# Allegro board A83T_REF4_LPDDR2_32X1_V1_0_20140821.brd
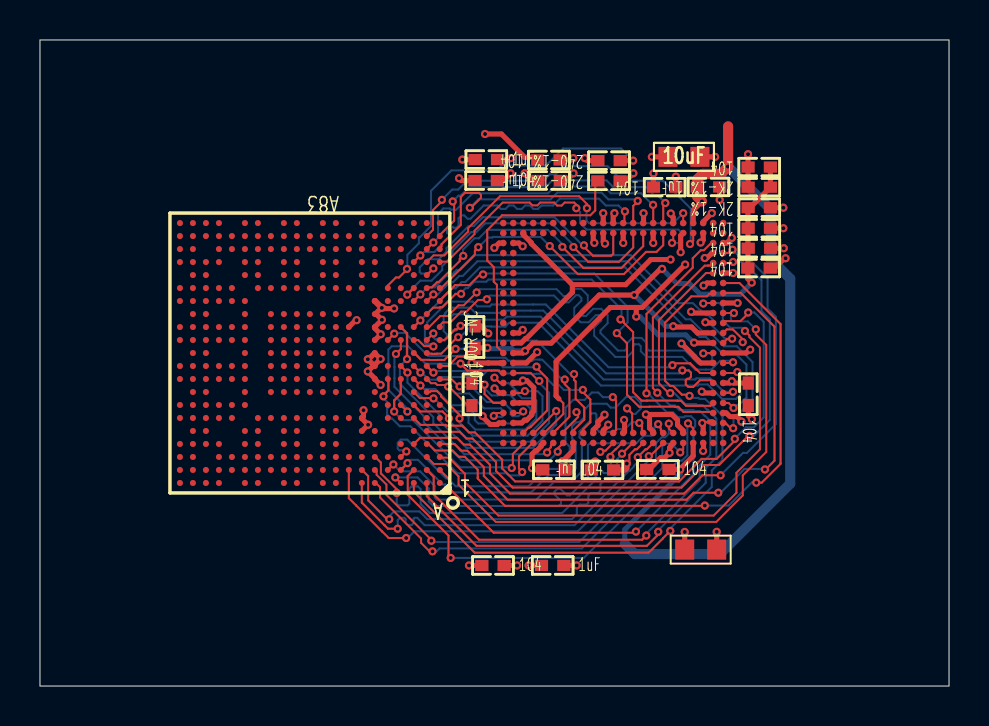
[diagram p0: board, top side]
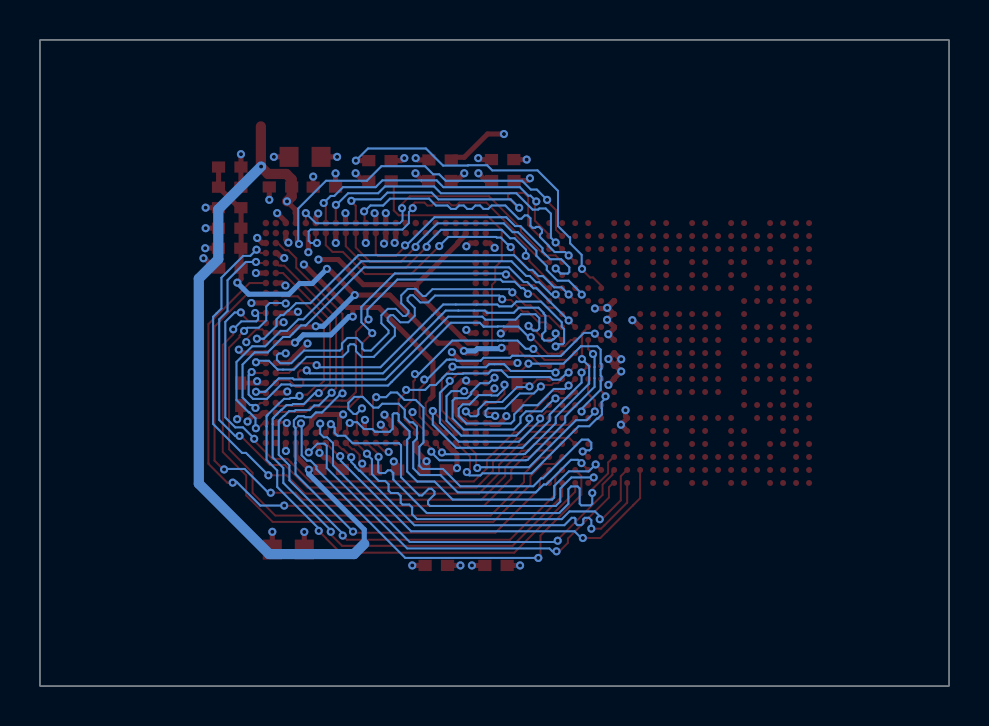
[diagram p1: board, bottom side, seen from below]

Outline 45.48 x 32.32 mm; copper layers: TOP, GND1, POWER1, BOTTOM. Coordinates in mm from the lower left corner of the outline.
Outline path: 0,32.32 0,0 45.48,0 45.48,32.32 0,32.32

## Design rules (mm)
net group SCK: nets SCK SCKB
net group ADD: nets SA0 SA1 SA2 SA3 SA4 SA5 SA6 SA7 SA8 SA9 SCKE0 SCKE1 SCS0 SCS1
net group DQS-CK: nets SDQS0 SDQS0B SDQS1 SDQS1B SDQS2 SDQS2B SDQS3 SDQS3B
net group SDQ0-7: nets SDQ0 SDQ1 SDQ2 SDQ3 SDQ4 SDQ5 SDQ6 SDQ7 SDQM0
net group SDQ8-15: nets SDQ8 SDQ9 SDQ10 SDQ11 SDQ12 SDQ13 SDQ14 SDQ15 SDQM1
net group SDQ16-23: nets SDQ16 SDQ17 SDQ18 SDQ19 SDQ20 SDQ21 SDQ22 SDQ23 SDQM2
net group SQD24-31: nets SDQ24 SDQ25 SDQ26 SDQ27 SDQ28 SDQ29 SDQ30 SDQ31 SDQM3

## Placement (name value [footprint] x y rotation side)
DC1  104  [C0402]  25.46 26.32 180 top
DC2  10uF  [C0603]  33.05 6.82 0 top
DC3  1uF  [C0402]  25.65 6.03 0 top
DC4  1uF  [C0402]  22.33 26.33 0 top
DC5  104  [C0402]  22.32 25.29 0 top
DC6  104  [C0402]  22.66 6.03 0 top
DC7  104  [C0402]  21.77 17.46 270 top
DC8  1uF  [C0402]  28.14 10.81 180 top
DC9  1uF  [C0402]  25.47 25.29 180 top
DC10  10uF  [C0603]  32.22 26.47 0 top
DC11  104  [C0402]  25.71 10.82 0 top
DC12  104  [C0402]  35.44 14.59 270 top
DC13  104  [C0402]  31.25 24.96 180 top
DC14  1uF  [C0402]  33.44 24.97 180 top
DC15  104  [C0402]  30.91 10.83 0 top
DC16  104  [C0402]  35.98 25.96 180 top
DC17  104  [C0402]  35.99 22.9 180 top
DC18  104  [C0402]  35.99 21.9 180 top
DC19  104  [C0402]  35.98 20.91 180 top
DR1  2K-1%  [R0402]  35.99 24.95 180 top
DR2  2K-1%  [R0402]  35.99 23.93 180 top
DR3  100R-NC  [R0402]  21.61 14.59 90 top
DR5  240-1%  [R0402]  28.47 26.28 180 top
DR8  240-1%  [R0402]  28.47 25.27 180 top
DU2  LPDDR2_PoP168BALL  [BGA168P0_50B12X12H0_72]  28.68 17.66 0 top
NOREF  -  []  6.47 23.96 0 top
NOREF#2  -  []  27.12 5.56 90 top
U1  A83T  [BGA345P0_65B14X14]  13.5 16.66 180 top

## Library data of the parts
DC1-DC19 = CAPACITOR_0
DR1-DR3 = ?_0
DR5 DR8 = R
DU2 = LPDDR2_PoP168BALL_1
U1 = A83T

## Footprints (pads in the part's own frame, mm; a bottom-side part is the same pattern mirrored in y, then rotated)
BGA168P0_50B12X12H0_72
  round 0.33 smd: A1(-5.5,5.5) A2(-5,5.5) A3(-4.5,5.5) A4(-4,5.5) A5(-3.5,5.5) A6(-3,5.5) A7(-2.5,5.5) A8(-2,5.5) A9(-1.5,5.5) A10(-1,5.5) A11(-0.5,5.5) A12(0,5.5) A13(0.5,5.5) A14(1,5.5) A15(1.5,5.5) A16(2,5.5) A17(2.5,5.5) A18(3,5.5) A19(3.5,5.5) A20(4,5.5) A21(4.5,5.5) A22(5,5.5) A23(5.5,5.5) AA1(-5.5,-4.5) AA2(-5,-4.5) AA22(5,-4.5) AA23(5.5,-4.5) AB1(-5.5,-5) AB2(-5,-5) AB3(-4.5,-5) AB4(-4,-5) AB5(-3.5,-5) AB6(-3,-5) AB7(-2.5,-5) AB8(-2,-5) AB9(-1.5,-5) AB10(-1,-5) AB11(-0.5,-5) AB12(0,-5) AB13(0.5,-5) AB14(1,-5) AB15(1.5,-5) AB16(2,-5) AB17(2.5,-5) AB18(3,-5) AB19(3.5,-5) AB20(4,-5) AB21(4.5,-5) AB22(5,-5) AB23(5.5,-5) AC1(-5.5,-5.5) AC2(-5,-5.5) AC3(-4.5,-5.5) AC4(-4,-5.5) AC5(-3.5,-5.5) AC6(-3,-5.5) AC7(-2.5,-5.5) AC8(-2,-5.5) AC9(-1.5,-5.5) AC10(-1,-5.5) AC11(-0.5,-5.5) AC12(0,-5.5) AC13(0.5,-5.5) AC14(1,-5.5) AC15(1.5,-5.5) AC16(2,-5.5) AC17(2.5,-5.5) AC18(3,-5.5) AC19(3.5,-5.5) AC20(4,-5.5) AC21(4.5,-5.5) AC22(5,-5.5) AC23(5.5,-5.5) B1(-5.5,5) B2(-5,5) B3(-4.5,5) B4(-4,5) B5(-3.5,5) B6(-3,5) B7(-2.5,5) B8(-2,5) B9(-1.5,5) B10(-1,5) B11(-0.5,5) B12(0,5) B13(0.5,5) B14(1,5) B15(1.5,5) B16(2,5) B17(2.5,5) B18(3,5) B19(3.5,5) B20(4,5) B21(4.5,5) B22(5,5) B23(5.5,5) C1(-5.5,4.5) C2(-5,4.5) C22(5,4.5) C23(5.5,4.5) D1(-5.5,4) D2(-5,4) D22(5,4) D23(5.5,4) E1(-5.5,3.5) E2(-5,3.5) E22(5,3.5) E23(5.5,3.5) F1(-5.5,3) F2(-5,3) F22(5,3) F23(5.5,3) G1(-5.5,2.5) G2(-5,2.5) G22(5,2.5) G23(5.5,2.5) H1(-5.5,2) H2(-5,2) H22(5,2) H23(5.5,2) J1(-5.5,1.5) J2(-5,1.5) J22(5,1.5) J23(5.5,1.5) K1(-5.5,1) K2(-5,1) K22(5,1) K23(5.5,1) L1(-5.5,0.5) L2(-5,0.5) L22(5,0.5) L23(5.5,0.5) M1(-5.5,0) M2(-5,0) M22(5,0) M23(5.5,0) N1(-5.5,-0.5) N2(-5,-0.5) N22(5,-0.5) N23(5.5,-0.5) P1(-5.5,-1) P2(-5,-1) P22(5,-1) P23(5.5,-1) R1(-5.5,-1.5) R2(-5,-1.5) R22(5,-1.5) R23(5.5,-1.5) T1(-5.5,-2) T2(-5,-2) T22(5,-2) T23(5.5,-2) U1(-5.5,-2.5) U2(-5,-2.5) U22(5,-2.5) U23(5.5,-2.5) V1(-5.5,-3) V2(-5,-3) V22(5,-3) V23(5.5,-3) W1(-5.5,-3.5) W2(-5,-3.5) W22(5,-3.5) W23(5.5,-3.5) Y1(-5.5,-4) Y2(-5,-4) Y22(5,-4) Y23(5.5,-4)
BGA345P0_65B14X14
  round 0.3 smd: A1(-6.5,6.5) A2(-5.85,6.5) A3(-5.2,6.5) A4(-4.55,6.5) A6(-3.25,6.5) A7(-2.6,6.5) A9(-1.3,6.5) A10(-0.65,6.5) A12(0.65,6.5) A13(1.3,6.5) A15(2.6,6.5) A16(3.25,6.5) A18(4.55,6.5) A19(5.2,6.5) A20(5.85,6.5) A21(6.5,6.5) AA1(-6.5,-6.5) AA2(-5.85,-6.5) AA3(-5.2,-6.5) AA4(-4.55,-6.5) AA6(-3.25,-6.5) AA7(-2.6,-6.5) AA9(-1.3,-6.5) AA10(-0.65,-6.5) AA12(0.65,-6.5) AA13(1.3,-6.5) AA15(2.6,-6.5) AA16(3.25,-6.5) AA18(4.55,-6.5) AA19(5.2,-6.5) AA20(5.85,-6.5) AA21(6.5,-6.5) B1(-6.5,5.85) B2(-5.85,5.85) B3(-5.2,5.85) B4(-4.55,5.85) B5(-3.9,5.85) B6(-3.25,5.85) B7(-2.6,5.85) B8(-1.95,5.85) B9(-1.3,5.85) B10(-0.65,5.85) B11(0,5.85) B12(0.65,5.85) B13(1.3,5.85) B14(1.95,5.85) B15(2.6,5.85) B16(3.25,5.85) B17(3.9,5.85) B18(4.55,5.85) B19(5.2,5.85) B20(5.85,5.85) B21(6.5,5.85) C1(-6.5,5.2) C2(-5.85,5.2) C4(-4.55,5.2) C5(-3.9,5.2) C6(-3.25,5.2) C7(-2.6,5.2) C8(-1.95,5.2) C9(-1.3,5.2) C10(-0.65,5.2) C11(0,5.2) C12(0.65,5.2) C13(1.3,5.2) C14(1.95,5.2) C15(2.6,5.2) C16(3.25,5.2) C17(3.9,5.2) C18(4.55,5.2) C20(5.85,5.2) C21(6.5,5.2) D1(-6.5,4.55) D2(-5.85,4.55) D3(-5.2,4.55) D4(-4.55,4.55) D6(-3.25,4.55) D7(-2.6,4.55) D9(-1.3,4.55) D10(-0.65,4.55) D12(0.65,4.55) D13(1.3,4.55) D15(2.6,4.55) D16(3.25,4.55) D18(4.55,4.55) D19(5.2,4.55) D20(5.85,4.55) D21(6.5,4.55) E2(-5.85,3.9) E3(-5.2,3.9) E6(-3.25,3.9) E7(-2.6,3.9) E9(-1.3,3.9) E10(-0.65,3.9) E12(0.65,3.9) E13(1.3,3.9) E15(2.6,3.9) E16(3.25,3.9) E19(5.2,3.9) E20(5.85,3.9) F1(-6.5,3.25) F2(-5.85,3.25) F3(-5.2,3.25) F4(-4.55,3.25) F5(-3.9,3.25) F7(-2.6,3.25) F8(-1.95,3.25) F9(-1.3,3.25) F10(-0.65,3.25) F11(0,3.25) F12(0.65,3.25) F13(1.3,3.25) F14(1.95,3.25) F15(2.6,3.25) F17(3.9,3.25) F18(4.55,3.25) F19(5.2,3.25) F20(5.85,3.25) F21(6.5,3.25) G1(-6.5,2.6) G2(-5.85,2.6) G3(-5.2,2.6) G4(-4.55,2.6) G5(-3.9,2.6) G6(-3.25,2.6) G16(3.25,2.6) G17(3.9,2.6) G18(4.55,2.6) G19(5.2,2.6) G20(5.85,2.6) G21(6.5,2.6) H2(-5.85,1.95) H3(-5.2,1.95) H6(-3.25,1.95) H8(-1.95,1.95) H9(-1.3,1.95) H10(-0.65,1.95) H11(0,1.95) H12(0.65,1.95) H13(1.3,1.95) H14(1.95,1.95) H16(3.25,1.95) H19(5.2,1.95) H20(5.85,1.95) J1(-6.5,1.3) J2(-5.85,1.3) J3(-5.2,1.3) J4(-4.55,1.3) J5(-3.9,1.3) J6(-3.25,1.3) J8(-1.95,1.3) J9(-1.3,1.3) J10(-0.65,1.3) J11(0,1.3) J12(0.65,1.3) J13(1.3,1.3) J14(1.95,1.3) J16(3.25,1.3) J17(3.9,1.3) J18(4.55,1.3) J19(5.2,1.3) J20(5.85,1.3) J21(6.5,1.3) K1(-6.5,0.65) K2(-5.85,0.65) K3(-5.2,0.65) K4(-4.55,0.65) K5(-3.9,0.65) K6(-3.25,0.65) K8(-1.95,0.65) K9(-1.3,0.65) K10(-0.65,0.65) K11(0,0.65) K12(0.65,0.65) K13(1.3,0.65) K14(1.95,0.65) K16(3.25,0.65) K17(3.9,0.65) K18(4.55,0.65) K19(5.2,0.65) K20(5.85,0.65) K21(6.5,0.65) L2(-5.85,0) L3(-5.2,0) L6(-3.25,0) L8(-1.95,0) L9(-1.3,0) L10(-0.65,0) L11(0,0) L12(0.65,0) L13(1.3,0) L14(1.95,0) L16(3.25,0) L19(5.2,0) L20(5.85,0) M1(-6.5,-0.65) M2(-5.85,-0.65) M3(-5.2,-0.65) M4(-4.55,-0.65) M5(-3.9,-0.65) M6(-3.25,-0.65) M8(-1.95,-0.65) M9(-1.3,-0.65) M10(-0.65,-0.65) M11(0,-0.65) M12(0.65,-0.65) M13(1.3,-0.65) M14(1.95,-0.65) M16(3.25,-0.65) M17(3.9,-0.65) M18(4.55,-0.65) M19(5.2,-0.65) M20(5.85,-0.65) M21(6.5,-0.65) N1(-6.5,-1.3) N2(-5.85,-1.3) N3(-5.2,-1.3) N4(-4.55,-1.3) N5(-3.9,-1.3) N6(-3.25,-1.3) N8(-1.95,-1.3) N9(-1.3,-1.3) N10(-0.65,-1.3) N11(0,-1.3) N12(0.65,-1.3) N13(1.3,-1.3) N14(1.95,-1.3) N16(3.25,-1.3) N17(3.9,-1.3) N18(4.55,-1.3) N19(5.2,-1.3) N20(5.85,-1.3) N21(6.5,-1.3) P2(-5.85,-1.95) P3(-5.2,-1.95) P6(-3.25,-1.95) P8(-1.95,-1.95) P9(-1.3,-1.95) P10(-0.65,-1.95) P11(0,-1.95) P12(0.65,-1.95) P13(1.3,-1.95) P14(1.95,-1.95) P16(3.25,-1.95) P19(5.2,-1.95) P20(5.85,-1.95) R1(-6.5,-2.6) R2(-5.85,-2.6) R3(-5.2,-2.6) R4(-4.55,-2.6) R5(-3.9,-2.6) R6(-3.25,-2.6) R16(3.25,-2.6) R17(3.9,-2.6) R18(4.55,-2.6) R19(5.2,-2.6) R20(5.85,-2.6) R21(6.5,-2.6) T1(-6.5,-3.25) T2(-5.85,-3.25) T3(-5.2,-3.25) T4(-4.55,-3.25) T5(-3.9,-3.25) T7(-2.6,-3.25) T8(-1.95,-3.25) T9(-1.3,-3.25) T10(-0.65,-3.25) T11(0,-3.25) T12(0.65,-3.25) T13(1.3,-3.25) T14(1.95,-3.25) T15(2.6,-3.25) T17(3.9,-3.25) T18(4.55,-3.25) T19(5.2,-3.25) T20(5.85,-3.25) T21(6.5,-3.25) U2(-5.85,-3.9) U3(-5.2,-3.9) U6(-3.25,-3.9) U7(-2.6,-3.9) U9(-1.3,-3.9) U10(-0.65,-3.9) U12(0.65,-3.9) U13(1.3,-3.9) U15(2.6,-3.9) U16(3.25,-3.9) U19(5.2,-3.9) U20(5.85,-3.9) V1(-6.5,-4.55) V2(-5.85,-4.55) V3(-5.2,-4.55) V4(-4.55,-4.55) V6(-3.25,-4.55) V7(-2.6,-4.55) V9(-1.3,-4.55) V10(-0.65,-4.55) V12(0.65,-4.55) V13(1.3,-4.55) V15(2.6,-4.55) V16(3.25,-4.55) V18(4.55,-4.55) V19(5.2,-4.55) V20(5.85,-4.55) V21(6.5,-4.55) W1(-6.5,-5.2) W2(-5.85,-5.2) W4(-4.55,-5.2) W5(-3.9,-5.2) W6(-3.25,-5.2) W7(-2.6,-5.2) W8(-1.95,-5.2) W9(-1.3,-5.2) W10(-0.65,-5.2) W11(0,-5.2) W12(0.65,-5.2) W13(1.3,-5.2) W14(1.95,-5.2) W15(2.6,-5.2) W16(3.25,-5.2) W17(3.9,-5.2) W18(4.55,-5.2) W20(5.85,-5.2) W21(6.5,-5.2) Y1(-6.5,-5.85) Y2(-5.85,-5.85) Y3(-5.2,-5.85) Y4(-4.55,-5.85) Y5(-3.9,-5.85) Y6(-3.25,-5.85) Y7(-2.6,-5.85) Y8(-1.95,-5.85) Y9(-1.3,-5.85) Y10(-0.65,-5.85) Y11(0,-5.85) Y12(0.65,-5.85) Y13(1.3,-5.85) Y14(1.95,-5.85) Y15(2.6,-5.85) Y16(3.25,-5.85) Y17(3.9,-5.85) Y18(4.55,-5.85) Y19(5.2,-5.85) Y20(5.85,-5.85) Y21(6.5,-5.85)
C0402
  rect 0.66x0.56 smd: 1(-0.56,0) 2(0.56,0)
C0603
  rect 0.95x1 smd: 1(-0.8,0) 2(0.8,0)
R0402
  rect 0.66x0.56 smd: 1(-0.56,0) 2(0.56,0)

## Nets
GND: DC1.1 DC2.1 DC3.1 DC4.1 DC5.1 DC6.1 DC7.1 DC8.1 DC9.1 DC10.1 DC11.1 DC12.1 DC13.1 DC14.1 DC15.1 DC17.1 DC18.1 DC19.1 DR2.1 DR5.2 DR8.1 DU2.A12(VSSQ_0) DU2.A15(VSSQ_1) DU2.A18(VSSQ_2) DU2.A21(VSS_0) DU2.AA1(VSS_5) DU2.AB7(VSSCA_1) DU2.AB11(VSS_7) DU2.AC5(VSS_6) DU2.AC12(VSSQ_3) DU2.AC15(VSSQ_4) DU2.AC18(VSSQ_5) DU2.AC21(VSS_8) DU2.B10(VSS_1) DU2.C1(VSS_2) DU2.C23(VSSQ_6) DU2.F23(VSSQ_7) DU2.J23(VSSQ_8) DU2.M2(VSS_3) DU2.M23(VSS_9) DU2.P23(VSSQ_9) DU2.R1(VSS_4) DU2.U23(VSSQ_10) DU2.V1(VSSCA_0) DU2.Y23(VSSQ_11) U1.A1(GND0) U1.A21(GND1) U1.AA1(GND35) U1.AA21(GND36) U1.C7(GND2) U1.C11(GND37) U1.F5(GND6) U1.G6(GND3) U1.G16(GND4) U1.G17(GND5) U1.H6(GND33) U1.H8(GND7) U1.H12(GND8) U1.H14(GND9) U1.H16(GND10) U1.J8(GND11) U1.J13(GND12) U1.J17(GND13) U1.K5(GND14) U1.K8(GND15) U1.K9(GND16) U1.K10(GND17) U1.K11(GND18) U1.K12(GND19) U1.L8(GND21) U1.L16(GND22) U1.M8(GND20) U1.N5(GND23) U1.N9(GND24) U1.N10(GND25) U1.N11(GND26) U1.N12(GND27) U1.N14(GND29) U1.N17(GND30) U1.P8(GND31) U1.P12(GND28) U1.P16(GND32) U1.T18(GND34) U1.U6(GND38)
VCC-DRAM: DC2.2 DC3.2 DC4.2 DC5.2 DC6.2 DC8.2 DC9.2 DC10.2 DC11.2 DC12.2 DC13.2 DC16.2 DR1.2 DU2.AA2(VDD2_4) DU2.AA22(VDDQ_11) DU2.AB10(VDD2_6) DU2.AB13(VDDQ_3) DU2.AB16(VDDQ_4) DU2.AB19(VDDQ_5) DU2.AB21(VDD2_7) DU2.AC8(VDDCA_2) DU2.B11(VDD2_0) DU2.B13(VDDQ_0) DU2.B16(VDDQ_1) DU2.B19(VDDQ_2) DU2.B21(VDD2_1) DU2.C2(VDD2_2) DU2.D22(VDDQ_6) DU2.G22(VDDQ_7) DU2.K22(VDDQ_8) DU2.L22(VDD2_5) DU2.R2(VDD2_3) DU2.R22(VDDQ_9) DU2.U2(VDDCA_0) DU2.V22(VDDQ_10) DU2.W2(VDDCA_1) U1.E7(VCC-DRAM1) U1.F7(VCC-DRAM3) U1.J6(VCC-DRAM4) U1.K6(VCC-DRAM5) U1.L6(VCC-DRAM7) U1.M6(VCC-DRAM6) U1.N6(VCC-DRAM8) U1.P6(VCC-DRAM0) U1.R6(VCC-DRAM2)
VDD18-LPDDR: DC14.2 DC15.2 DU2.A11(VDD1_0) DU2.A20(VDD1_1) DU2.AB5(VDD1_4) DU2.AC20(VDD1_5) DU2.B3(VDD1_2) DU2.N2(VDD1_3) DU2.N22(VDD1_6)
VDD-DRAMPLL: DC1.2 U1.N8(VDD-SPLL)
SA0: DU2.AC6(CA0) U1.N4(SA0)
SA1: DU2.AB6(CA1) U1.M5(SA1)
SA2: DU2.AC7(CA2) U1.M4(SA2)
SA3: DU2.AB8(CA3) U1.L3(SA3)
SA4: DU2.AB9(CA4) U1.K3(SA4)
SA5: DU2.W1(CA5) U1.J3(SA5)
SA6: DU2.V2(CA6) U1.H2(SA6)
SA7: DU2.U1(CA7) U1.H3(SA7)
SA8: DU2.T2(CA8) U1.G3(SA8)
SA9: DU2.T1(CA9) U1.G4(SA9)
SCK: DR3.2 DU2.Y2(CK_T) U1.J1(SCK)
SCKB: DR3.1 DU2.Y1(CK_C) U1.J2(SCKB)
SCKE0: DU2.AC3(CKE0) U1.J4(SCKE0)
SCKE1: DU2.AC4(CKE1) U1.J5(SCKE1)
SCS0: DU2.AB3(CS0_N) U1.K2(SCS0)
SCS1: DU2.AB4(CS1_N) U1.K4(SCS1)
SDQ0: DU2.AA23(DQ0) U1.R2(SDQ0)
SDQ1: DU2.Y22(DQ1) U1.R1(SDQ1)
SDQ2: DU2.W22(DQ2) U1.P2(SDQ2)
SDQ3: DU2.W23(DQ3) U1.N3(SDQ3)
SDQ4: DU2.V23(DQ4) U1.M1(SDQ4)
SDQ5: DU2.U22(DQ5) U1.M2(SDQ5)
SDQ6: DU2.T22(DQ6) U1.M3(SDQ6)
SDQ7: DU2.T23(DQ7) U1.L2(SDQ7)
SDQ8: DU2.A17(DQ25) U1.Y1(SDQ8)
SDQ9: DU2.A16(DQ26) U1.W2(SDQ9)
SDQ10: DU2.A14(DQ29) U1.W1(SDQ10)
SDQ11: DU2.A13(DQ30) U1.V3(SDQ11)
SDQ12: DU2.B12(DQ31) U1.U2(SDQ12)
SDQ13: DU2.B14(DQ28) U1.T3(SDQ13)
SDQ14: DU2.B15(DQ27) U1.T2(SDQ14)
SDQ15: DU2.B17(DQ24) U1.T1(SDQ15)
SDQ16: DU2.E23(DQ13) U1.E2(SDQ16)
SDQ17: DU2.G23(DQ10) U1.D2(SDQ17)
SDQ18: DU2.H23(DQ9) U1.D1(SDQ18)
SDQ19: DU2.D23(DQ14) U1.D3(SDQ19)
SDQ20: DU2.F22(DQ11) U1.A2(SDQ20)
SDQ21: DU2.E22(DQ12) U1.B2(SDQ21)
SDQ22: DU2.C22(DQ15) U1.B1(SDQ22)
SDQ23: DU2.H22(DQ8) U1.A3(SDQ23)
SDQ24: DU2.AB17(DQ22) U1.A4(SDQ24)
SDQ25: DU2.AB14(DQ18) U1.B4(SDQ25)
SDQ26: DU2.AB12(DQ16) U1.C4(SDQ26)
SDQ27: DU2.AB15(DQ20) U1.B5(SDQ27)
SDQ28: DU2.AC13(DQ17) U1.C6(SDQ28)
SDQ29: DU2.AC16(DQ21) U1.A7(SDQ29)
SDQ30: DU2.AC17(DQ23) U1.B8(SDQ30)
SDQ31: DU2.AC14(DQ19) U1.B7(SDQ31)
SDQM0: DU2.N23(DM0) U1.R3(SDQM0)
SDQM1: DU2.B20(DM3) U1.Y2(SDQM1)
SDQM2: DU2.L23(DM1) U1.F3(SDQM2)
SDQM3: DU2.AB20(DM2) U1.B3(SDQM3)
SDQS0: DU2.R23(DQS0_T) U1.N1(SDQS0)
SDQS0B: DU2.P22(DQS0_C) U1.N2(SDQS0B)
SDQS1: DU2.B18(DQS3_T) U1.V1(SDQS1)
SDQS1B: DU2.A19(DQS3_C) U1.V2(SDQS1B)
SDQS2: DU2.J22(DQS1_T) U1.C1(SDQS2)
SDQS2B: DU2.K23(DQS1_C) U1.C2(SDQS2B)
SDQS3: DU2.AB18(DQS2_T) U1.B6(SDQS3)
SDQS3B: DU2.AC19(DQS2_C) U1.A6(SDQS3B)
SVREF: DC7.2 DC16.1 DC17.2 DC18.2 DC19.2 DR1.1 DR2.2 DU2.M22(VREFDQ) DU2.P2(VREFCA) U1.K1(SVREF)
N21024816: DR5.1 U1.T5(SZQ)
N21100572: DR8.2 DU2.P1(ZQ)

Pads without a net: DU2 A1 A2 A3 A4 A5 A6 A7 A8 A9 A10 A22 A23 AB1 AB2 AB22 AB23 AC1 AC2 AC9 AC10 AC11 AC22 AC23 B1 B2 B4 B5 B6 B7 B8 B9 B22 B23 D1 D2 E1 E2 F1 F2 G1 G2 H1 H2 J1 J2 K1 K2 L1 L2 M1 N1; U1 A9 A10 A12 A13 A15 A16 A18 A19 A20 AA2 AA3 AA4 AA6 AA7 AA9 AA10 AA12 AA13 AA15 AA16 AA18 AA19 AA20 B9 B10 B11 B12 B13 B14 B15 B16 B17 B18 B19 B20 B21 C5 C8 C9 C10 C12 C13 C14 C15 C16 C17 C18 C20 C21 D4 D6 D7 D9 D10 D12 D13 D15 D16 D18 D19 D20 D21 E3 E6 E9 E10 E12 E13 E15 E16 E19 E20 F1 F2 F4 F8 F9 F10 F11 F12 F13 F14 F15 F17 F18 F19 F20 F21 G1 G2 G5 G18 G19 G20 G21 H9 H10 H11 H13 H19 H20 J9 J10 J11 J12 J14 J16 J18 J19 J20 J21 K13 K14 K16 K17 K18 K19 K20 K21 L9 L10 L11 L12 L13 L14 L19 L20 M9 M10 M11 M12 M13 M14 M16 M17 M18 M19 M20 M21 N13 N16 N18 N19 N20 N21 P3 P9 P10 P11 P13 P14 P19 P20 R4 R5 R16 R17 R18 R19 R20 R21 T4 T7 T8 T9 T10 T11 T12 T13 T14 T15 T17 T19 T20 T21 U3 U7 U9 U10 U12 U13 U15 U16 U19 U20 V4 V6 V7 V9 V10 V12 V13 V15 V16 V18 V19 V20 V21 W4 W5 W6 W7 W8 W9 W10 W11 W12 W13 W14 W15 W16 W17 W18 W20 W21 Y3 Y4 Y5 Y6 Y7 Y8 Y9 Y10 Y11 Y12 Y13 Y14 Y15 Y16 Y17 Y18 Y19 Y20 Y21

## Via types
v1: diameter 0.406, hole 0.203, TOP to BOTTOM, 219 vias

## Routing (per net, layer and track width the routed paths; a pad name or vN(x,y) marks a point on that pad's centre or on a via; arc(x,y) is an arc through that point)
GND: length 36.4
  TOP w0.102: DU2.M23 34.36,17.84 34.66,17.84 35.14,17.37 35.14,17.22 v1(35.16,17.2) ; v1(26.84,13.7) 26.84,13.68 26.92,13.6 26.92,13.46 26.18,12.71 DU2.AB7 ; 34.59,13.48 34.51,13.48 ; v1(29.36,11.13) 29.36,11.12 29.48,11.12 29.49,11.13 29.49,11.56 29.77,11.84 29.86,11.84 DU2.AC15 ; v1(28.03,11.71) 28.05,11.71 28.11,11.77 28.29,11.77 DU2.AC12
  TOP w0.254: DC19.1 36.76,20.91 37.25,21.4 v1(37.3,21.4) ; DC9.1 26.33,25.29 v1(26.69,25.65) ; 34.51,13.48 34.33,13.66 DU2.Y23 ; v1(20.96,25.4) 21.08,25.29 DC5.1 ; v1(34.61,22.42) 34.35,22.16 DU2.C23 ; DC10.1 v1(30.61,26.47) ; DC18.1 v1(37.21,21.9) ; DC15.1 30.46,10.83 31.05,11.42 31.25,11.42 v1(31.5,11.66) 31.5,11.92 31.57,12 31.57,12.05 DU2.AC18 ; DC2.1 v1(32.25,7.71) ; v1(28.74,23.65) 28.68,23.6 DU2.A12 ; DU2.AA1 22.96,13.16 22.88,13.08 22.53,13.08 22.15,13.46 v1(22.15,13.5) ; DU2.J23 v1(34.9,19.16) ; v1(35.53,16.83) 35.52,16.82 35.51,16.82 35.42,16.73 35.4,16.73 35.33,16.66 DU2.P23 ; DU2.A21 33.18,23.22 v1(33.61,23.66) ; v1(22.74,14.89) 22.97,14.66 DU2.V1 ; DU2.A18 31.68,23.45 31.58,23.55 31.58,23.62 v1(31.56,23.64) ; DU2.R1 23.04,16.16 23.04,16.16 22.43,16.16 v1(21.59,16.16) ; v1(29.69,25.65) 29.3,25.27 DR8.1 ; v1(22.43,17.63) 22.04,18.02 DC7.1 ; v1(27.73,22.17) 27.68,22.22 DU2.B10 ; DU2.C1 22.97,22.16 v1(22.73,21.92) ; DU2.U23 34.53,15.16 v1(34.61,15.25) 34.71,15.15 DC12.1 ; DR2.1 v1(37.19,23.93) ; v1(33.17,11.76) 33.2,11.78 33.2,12.14 DU2.AC21 ; DC3.1 v1(24.44,6.03) ; DC4.1 v1(21.13,26.33) ; DU2.M2 23.98,17.66 24.13,17.82 v1(24.15,17.82) ; v1(30.2,23.65) 30.19,23.65 30.19,23.17 DU2.A15 ; DC17.1 v1(37.19,22.9) ; v1(28.43,13.07) 28.43,13.03 28.18,12.78 DU2.AB11 ; DC1.1 26.57,26.32 26.66,26.41 v1(26.68,26.41) ; DR5.2 27.39,26.28 27.27,26.41 v1(27.25,26.41) ; 29.36,11.12 29.36,10.89 29.27,10.81 DC8.1 ; DC13.1 v1(31.81,25.48) ; DC14.1 v1(34,24.32) ; v1(35.09,13.23) 35.09,13.26 34.87,13.48 34.59,13.48 ; DC6.1 v1(21.46,6.03) ; DC11.1 24.7,10.82 v1(24.62,10.9) 24.62,11.6 24.78,11.77 24.84,11.77 25.07,12 25.07,12.05 DU2.AC5 ; DU2.F23 v1(34.67,20.66)
VCC-DRAM: length 43.3
  TOP w0.102: v1(33.13,13.16) 33.14,13.16 33.16,13.16 33.21,13.21 33.48,13.21
  TOP w0.203: 16.75,16.7 16.47,16.41
  TOP w0.254: DU2.B16 v1(30.68,22.16) ; 24.7,14.17 24.7,14.17 23.99,14.17 23.99,14.16 DU2.W2 ; 24.7,14.17 24.7,14.93 24.35,15.28 v1(24.16,15.28) 24.04,15.16 DU2.U2 ; 24.7,14.17 24.7,13.76 24.61,13.66 24.61,13.56 24.35,13.3 24.24,13.3 24.1,13.16 DU2.AA2 ; DU2.B19 32.05,22.53 v1(32.05,21.7) ; 16.74,16.01 v1(16.4,16.35) 16.47,16.41 16.51,16.41 16.75,16.65 ; 16.74,16.01 16.67,16.01 v1(16.4,15.74) 16.75,15.38 U1.J6 16.75,15.35 v1(17.04,15.06) ; 16.74,16.01 U1.K6 16.75,16.07 v1(17.04,16.36) 16.75,16.65 16.75,16.65 ; v1(29.22,13.31) 29.24,13.29 29.24,12.72 DU2.AB13 ; v1(33.29,18.2) 33.33,18.16 DU2.L22 ; DC13.2 v1(30.69,25.64) ; v1(24.25,25.65) 24.61,25.29 DC9.2 ; DU2.B13 v1(29.18,22.16) ; DC5.2 23.18,25.29 v1(23.54,25.65) ; v1(17.72,18.89) 17.61,18.89 17.61,18.88 17.25,18.88 17.21,18.92 v1(17.1,18.92) 17.1,18.92 17.08,18.9 17.07,18.9 16.77,18.61 ; DU2.AB21 33.18,13.09 33.13,13.13 v1(33.13,13.16) ; v1(33.05,22.18) 33.18,22.31 DU2.B21 ; v1(24.87,16.7) 24.33,16.16 DU2.R2 ; DU2.V22 33.18,14.66 v1(33.11,14.73) ; DC10.2 v1(33.78,26.47) ; 16.77,18.61 16.82,18.61 v1(17.11,18.32) 17.11,18.32 16.75,17.96 U1.N6 16.75,17.89 v1(17.05,17.6) 16.76,17.31 U1.M6 ; 16.77,18.61 U1.P6 ; DC11.2 26.27,11.11 v1(26.14,11.25) 26.68,11.79 DU2.AC8 ; DC8.2 27.58,11.04 v1(27.78,11.23) ; DR1.2 35.43,25.96 DC16.2 v1(35.42,26.6) ; DC3.2 v1(26.85,6.03) ; DC12.2 35.44,13.52 v1(35.61,13.35) ; 16.75,16.65 U1.L6 ; v1(24.15,22) 24.14,22 24.12,22.02 24.11,22.02 23.97,22.16 DU2.C2 ; DU2.AB19 32.18,12.77 31.9,13.05 31.9,13.3 31.61,13.58 v1(30.31,13.58) 30.49,13.4 30.49,12.92 30.5,12.92 30.5,12.91 30.68,12.73 DU2.AB16 ; v1(32.57,18.72) 32.64,18.66 DU2.K22 ; DU2.D22 33.61,21.66 33.37,21.42 33.26,21.42 v1(33.26,21.41) ; v1(16.18,13.8) 16.18,13.49 U1.F7 16.1,13.38 v1(16.42,13.07) U1.E7 ; v1(32.09,17.13) 32.75,16.48 32.75,16.46 33.06,16.16 DU2.R22 ; v1(23.55,26.41) 23.54,26.41 23.46,26.33 DC4.2 ; DC2.2 v1(33.85,7.71) ; 33.48,13.21 33.63,13.21 DU2.AA22 ; DU2.G22 33.37,20.16 33.25,20.05 33.25,20.05 33.24,20.03 v1(33.2,20.03) ; DC6.2 v1(23.87,6.03) ; v1(28.27,22.13) 28.18,22.22 DU2.B11 ; DU2.AB10 27.68,12.81 27.91,13.03 27.91,13.04 27.91,13.05 27.91,13.21 28.24,13.54 v1(28.24,13.57)
  TOP w0.305: v1(17.1,18.92) 16.76,19.26 U1.R6
  POWER1 w0.102: 16.29,14.28 16.18,14.18 16.18,14.11 ; 16.29,14.28 16.29,14.36 ; 16.29,14.28 16.25,14.28 16.1,14.14 16.1,14.08 ; 16.1,14.08 16.1,13.38 16.13,13.36 ; 16.1,14.08 16.13,14.05 ; 16.13,14.05 16.18,14.11 ; 16.13,14.05 16.13,13.36 ; 16.18,14.11 v1(16.18,13.8) ; 16.13,13.36 v1(16.42,13.07)
VDD18-LPDDR: length 87.1
  TOP w0.102: DU2.AB5 25.23,12.66 26.18,13.61 26.18,14.15 25.96,14.37
  TOP w0.254: v1(28.18,23.65) 28.18,23.65 DU2.A11 ; 25.96,14.37 25.82,14.51 25.82,16.23 28.53,18.94 29.81,18.94 ; 29.81,18.94 29.83,18.91 v1(29.83,18.48) ; 29.81,18.94 30.13,18.94 v1(32.27,21.09) ; DU2.N2 24.07,17.16 24.29,17.38 24.33,17.38 26.63,19.69 26.63,20.08 ; 26.63,20.08 24.58,22.13 24.58,22.18 24.18,22.58 DU2.B3 ; 26.63,20.08 29.3,20.08 30.56,21.33 v1(31.54,21.33) ; DU2.AC20 32.68,11.51 32.03,10.86 v1(32.03,10.82) 32.02,10.83 DC15.2 ; DU2.A20 32.68,23.66 32.71,23.66 32.71,23.84 v1(33.12,24.24) ; v1(32.72,17.18) 32.74,17.16 DU2.N22
  TOP w0.508: v1(34.41,25.99) 34.43,25.97 ; 34.43,25.97 34.43,28 ; 34.43,25.97 34.07,25.62 33.15,25.62 32.88,25.35 DC14.2 32.88,24.48 v1(33.12,24.24)
  GND1 w0.508: v1(33.12,24.24) 32.46,24.9 28.79,24.9 28.18,24.29 v1(28.18,23.65)
  POWER1 w0.508: v1(31.54,21.33) 31.79,21.09 v1(32.27,21.09) 32.79,21.09 33.02,20.85 33.49,20.85 33.49,20.85 33.59,20.85 33.98,21.24 33.98,23.07 34.7,23.8 34.7,24.86 34.35,25.21 33.63,25.21 33.08,24.67 33.08,24.28 v1(33.12,24.24)
  BOTTOM w0.254: v1(29.83,18.48) 30.02,18.48 30.93,17.57 32.3,17.57 32.69,17.18 v1(32.72,17.18) ; v1(32.03,10.82) 32.03,10.6 29.25,7.83 29.25,7.11
  BOTTOM w0.508: 29.25,7.11 29.76,6.6 34.01,6.6 37.53,10.12 37.53,20.38 36.56,21.35 36.56,23.84 v1(34.41,25.99)
VDD-DRAMPLL: length 16.5
  TOP w0.254: DC1.2 24.77,26.45 24.25,26.45 23.09,27.61 v1(22.27,27.61) ; v1(15.84,18.3) 15.81,18.27 15.76,18.27 U1.N8
  POWER1 w0.254: v1(22.27,27.61) 21,27.61 18.89,25.51 18.89,23.47 17.92,22.5 17.92,20.99 16.96,20.03 16.96,19.42 16.17,18.62 16.16,18.62 v1(15.84,18.3)
  BOTTOM w0.254: 15.81,18.29 15.83,18.3 v1(15.84,18.3)
SA0: length 12.8
  TOP w0.102: DU2.AC6 25.56,12.04 25.56,11.94 25.37,11.75 v1(25.37,11.68)
  TOP w0.113: U1.N4 18.36,17.65 18.36,16.36 v1(18.36,16.35)
  BOTTOM w0.102: v1(18.36,16.35) 18,15.99 18,15.13 19.68,13.45 19.68,13.15 21.03,11.79 21.21,11.61 21.28,11.61 21.29,11.6 25.16,11.6 25.25,11.68 v1(25.37,11.68)
SA1: length 13.1
  TOP w0.102: DU2.AB6 25.89,12.87 26.47,13.45 26.47,13.47 26.49,13.48 26.49,14.87 26.25,15.1 v1(26.25,15.33)
  TOP w0.113: v1(17.72,17.62) 17.72,17.62 U1.M5
  BOTTOM w0.102: v1(17.72,17.62) 17.76,17.67 18.26,17.67 19.42,16.51 20.94,16.51 20.95,16.52 21.85,16.52 21.95,16.42 23.29,16.42 23.44,16.27 24.63,16.27 24.69,16.33 24.99,16.33 24.99,16.33 25.12,16.33 26.12,15.33 v1(26.25,15.33)
SA2: length 13.1
  TOP w0.102: v1(25.9,11.72) 25.9,11.88 DU2.AC7 ; v1(17.81,16.61) 18.05,16.86 U1.M4
  BOTTOM w0.102: v1(17.81,16.61) 17.73,16.54 17.73,15.95 17.74,15.95 17.74,15.4 17.73,15.39 17.73,14.96 19.2,13.5 19.2,13.19 21.09,11.31 21.15,11.31 21.16,11.29 25.49,11.29 25.87,11.67 25.87,11.69 v1(25.9,11.72)
SA3: length 12.6
  TOP w0.102: v1(20.79,16.86) 20.78,16.86 20.23,16.31 19.88,16.31 19.87,16.31 19.49,16.31 19.48,16.32 19.06,16.32 18.72,16.66 U1.L3 ; v1(26.72,15.6) 26.72,15.32 26.8,15.24 26.8,14.37 27.23,13.94 27.23,13.33 27.22,13.32 27.22,13.32 26.68,12.78 DU2.AB8
  BOTTOM w0.102: v1(20.79,16.86) 20.8,16.87 21.18,16.87 21.59,17.28 22.28,17.28 24.85,17.28 26.53,15.6 v1(26.72,15.6)
SA4: length 11.8
  TOP w0.102: v1(27.16,14.81) 27.16,14.71 27.53,14.33 27.53,13.21 27.52,13.2 27.52,13.19 27.18,12.85 DU2.AB9
  TOP w0.113: v1(19.03,15.68) 19.03,15.68 U1.K3
  BOTTOM w0.102: v1(27.16,14.81) 26.21,14.81 25.96,15.06 25.68,15.06 25.33,15.4 25.33,15.41 25.13,15.62 24.83,15.62 24.82,15.61 24.33,15.61 24.31,15.64 23.04,15.64 22.88,15.8 22.4,15.8 22.05,15.45 19.96,15.45 19.83,15.33 19.45,15.33 19.1,15.68 v1(19.03,15.68)
SA5: length 11.9
  TOP w0.102: v1(22.24,15.07) 22.24,14.61 22.69,14.16 DU2.W1
  TOP w0.113: U1.J3 19.03,15.03 v1(19.03,15.03)
  BOTTOM w0.102: v1(22.24,15.07) 22.24,14.89 22.59,14.53 22.9,14.53 22.91,14.55 23.52,14.55 23.98,14.09 24.32,14.09 24.53,13.88 24.53,13.52 24.15,13.13 21.92,13.13 21.75,13.3 21.75,13.59 21.29,14.05 20.59,14.05 19.77,14.86 19.2,14.86 v1(19.03,15.03)
SA6: length 10.1
  TOP w0.102: U1.H2 19.51,14.71 19.55,14.75 19.87,14.75 20.06,14.55 20.06,14.49 20.96,13.6 20.96,13.41 v1(20.99,13.38) ; DU2.V2 24.17,14.66 v1(24.26,14.75)
  BOTTOM w0.102: v1(20.99,13.38) 20.99,13.18 21.65,12.52 24.4,12.52 25.14,13.26 25.14,14.5 24.89,14.75 v1(24.26,14.75)
SA7: length 11.4
  TOP w0.102: v1(22.73,15.42) 22.75,15.42 23.02,15.16 DU2.U1 ; v1(19.69,14.39) 19.67,14.4 19.01,14.4 U1.H3
  BOTTOM w0.102: v1(22.73,15.42) 22.75,15.42 23.03,15.15 23.45,15.15 23.9,14.7 23.9,14.6 24.11,14.4 24.71,14.4 24.83,14.27 24.83,13.39 24.27,12.83 21.77,12.83 21.44,13.16 21.44,13.46 21.16,13.74 20.37,13.74 19.73,14.39 v1(19.69,14.39)
SA8: length 11.8
  TOP w0.102: DU2.T2 24,15.66 24,15.66 24.54,15.66 24.94,15.26 v1(24.98,15.26) ; v1(20.46,13.39) 20.46,13.42 20.14,13.73 19.03,13.73 U1.G3
  BOTTOM w0.102: v1(24.98,15.26) 24.98,15.16 25.47,14.67 25.47,13.16 24.53,12.22 21.52,12.22 20.46,13.28 v1(20.46,13.39)
SA9: length 10.4
  TOP w0.102: v1(21.04,16.13) 21.39,15.78 22.59,15.78 22.59,15.78 22.97,15.78 23.09,15.66 DU2.T1
  TOP w0.113: U1.G4 18.38,13.73 v1(18.38,13.73)
  BOTTOM w0.102: v1(18.38,13.73) 18.38,13.87 17.43,14.82 17.43,15.26 17.39,15.3 17.39,15.49 17.43,15.53 17.43,15.83 17.39,15.87 17.39,16.1 17.43,16.15 17.43,16.83 17.6,17 18.42,17 19.29,16.13 v1(21.04,16.13)
SCK: length 6.4
  TOP w0.097: U1.J1 20.02,15.34 20.6,15.34 20.95,14.99 v1(20.99,14.99) 21.15,15.15 DR3.2 ; v1(24.17,13.74) 24.1,13.66 DU2.Y2
  BOTTOM w0.097: v1(20.99,14.99) 21.03,14.95 21.34,14.95 21.61,14.95 22.35,14.21 23.17,14.21 23.54,13.84 23.54,13.59 23.64,13.5 23.93,13.5 v1(24.17,13.74)
SCKB: length 7.4
  TOP w0.097: U1.J2 19.56,15.15 19.79,15.15 19.88,15.06 20.34,15.06 v1(20.42,14.98) 20.45,14.98 21.41,14.03 DR3.1 ; DU2.Y1 22.88,13.66 22.73,13.51 v1(22.7,13.51)
  BOTTOM w0.097: v1(20.42,14.98) 20.77,14.63 21.48,14.63 22.22,13.89 23.06,13.89 23.19,13.76 23.19,13.53 23.12,13.46 22.76,13.46 v1(22.7,13.51)
SCKE0: length 10.3
  TOP w0.102: DU2.AC3 24.18,12.13 23.66,11.61 23.66,10.96 v1(23.6,10.91)
  TOP w0.113: v1(17.72,13.73) 17.72,14.29 18.05,14.62 U1.J4
  BOTTOM w0.102: v1(23.6,10.91) 23.5,10.91 23.47,10.94 21.01,10.94 18.66,13.3 18.13,13.3 17.72,13.7 v1(17.72,13.73)
SCKE1: length 11.9
  TOP w0.102: v1(24.12,10.7) 24.12,10.72 23.96,10.88 23.96,11.48 24.63,12.15 24.67,12.15 DU2.AC4
  TOP w0.113: v1(17.18,14.49) 17.18,14.54 17.43,14.79 17.43,15.33 U1.J5
  BOTTOM w0.102: v1(24.12,10.7) 24.12,10.66 23.99,10.54 23.44,10.54 23.34,10.64 20.88,10.64 18.53,12.99 18,12.99 17.62,13.38 17.57,13.38 17.37,13.59 17.37,13.88 17.38,13.9 17.38,14.2 17.18,14.4 v1(17.18,14.49)
SCS0: length 9.9
  TOP w0.102: DU2.AB3 24.44,12.92 24.49,12.92 24.55,12.98 24.56,12.98 25.37,13.79 25.37,15.39 24.84,15.92 v1(24.84,15.98)
  TOP w0.113: U1.K2 19.68,15.68 v1(19.68,15.68)
  BOTTOM w0.102: v1(24.84,15.98) 24.81,15.95 23.16,15.95 23.01,16.1 22.76,16.1 22.26,16.1 21.92,15.76 19.76,15.76 v1(19.68,15.68)
SCS1: length 12.7
  TOP w0.102: v1(25.83,13.76) 24.73,12.66 DU2.AB4
  TOP w0.113: U1.K4 18.38,15.68 v1(18.38,15.68)
  BOTTOM w0.102: v1(25.83,13.76) 25.83,13.09 24.65,11.92 24.58,11.92 21.34,11.92 19.98,13.27 19.98,13.58 18.38,15.18 18.38,15.67 18.38,15.67 v1(18.38,15.68)
SDQ0: length 23.6
  TOP w0.102: v1(34.68,12.9) 34.67,12.91 34.55,12.91 34.29,13.16 DU2.AA23
  TOP w0.113: v1(19.68,19.59) 19.68,19.59 U1.R2
  BOTTOM w0.102: v1(34.68,12.9) 34.7,12.91 34.7,13.39 35,13.69 35.03,13.69 35.65,14.31 35.65,16.21 34.86,16.99 34.21,16.99 33.44,17.77 33.12,17.77 32.55,18.34 32.3,18.34 29.4,21.25 21.89,21.25 21.15,20.51 20.97,20.51 20.66,20.2 20.51,20.2 19.9,19.59 v1(19.68,19.59)
SDQ1: length 20.2
  TOP w0.102: v1(22.17,20.59) 22.16,20.59 22.02,20.59 21.48,20.06 20.77,20.06 20,19.29 U1.R1 ; DU2.Y22 33.63,13.71 32.19,13.71 31.93,13.97 31.77,13.97 31.76,13.97 30.5,13.97 30.49,13.97 29.97,13.97 29.55,14.39 29.37,14.57 29.37,17.14 v1(28.86,17.65)
  BOTTOM w0.102: v1(22.17,20.59) 22.22,20.64 27.73,20.64 29.4,18.97 29.4,18.19 v1(28.86,17.65)
SDQ2: length 19.9
  TOP w0.102: v1(21.07,19.62) 20.79,19.62 20.13,18.95 20.03,18.95 20,18.93 19.67,18.93 U1.P2 ; v1(29.04,18.34) 29.11,18.34 29.22,18.24 29.22,18.16 29.67,17.71 29.67,14.7 30.1,14.27 30.36,14.27 30.37,14.28 31.89,14.28 31.9,14.27 32.06,14.27 32.07,14.26 32.08,14.26 32.32,14.02 33.54,14.02 DU2.W22
  BOTTOM w0.102: v1(21.07,19.62) 21.07,19.67 21.3,19.9 21.4,19.9 21.73,20.23 22.33,20.23 22.44,20.33 27.6,20.33 29.09,18.84 29.09,18.39 v1(29.04,18.34)
SDQ3: length 23
  TOP w0.102: v1(34.7,13.91) 34.45,14.16 DU2.W23
  TOP w0.113: U1.N3 19.03,18.29 v1(19.03,18.29)
  BOTTOM w0.102: v1(34.7,13.91) 34.84,14.06 34.97,14.06 35.34,14.43 35.34,16.08 34.73,16.69 34.08,16.69 33.31,17.46 33,17.46 32.82,17.64 32.42,18.04 32.2,18.04 32.18,18.04 29.27,20.94 22.01,20.94 21.28,20.21 21.1,20.21 20.89,20 20.89,20 20.79,19.9 20.64,19.9 v1(19.03,18.29)
SDQ4: length 19.1
  TOP w0.102: v1(21.04,18.02) 20.86,17.84 20.76,17.84 20.23,17.31 U1.M1 ; v1(34.67,14.72) 34.61,14.66 DU2.V23
  BOTTOM w0.102: v1(34.67,14.72) 34.2,14.72 33.53,15.39 32.83,15.39 32.78,15.34 28.19,15.34 25.23,18.3 25.05,18.48 23.35,18.48 23.2,18.33 21.69,18.33 21.42,18.6 20.69,18.6 20.5,18.41 20.5,17.89 20.6,17.78 20.8,17.78 v1(21.04,18.02)
SDQ5: length 19.1
  TOP w0.102: U1.M2 19.35,17.31 v1(19.68,17.64) ; v1(32.13,15.79) 32.46,15.79 32.57,15.68 32.57,15.47 32.46,15.37 32.38,15.37 32.31,15.29 32.31,15.09 32.44,14.96 32.68,14.96 33.01,15.3 33.54,15.3 DU2.U22
  BOTTOM w0.102: v1(32.13,15.79) 31.99,15.64 28.32,15.64 25.54,18.42 25.36,18.6 25.18,18.78 24.55,18.78 23.22,18.78 23.11,18.67 21.78,18.67 21.52,18.92 20.54,18.92 20.28,18.67 20.28,18.63 20.19,18.54 20.19,17.76 20.35,17.6 20.35,17.39 20.25,17.28 19.89,17.28 19.83,17.34 19.78,17.34 19.68,17.45 v1(19.68,17.64)
SDQ6: length 19.1
  TOP w0.102: v1(31.64,16.05) 31.73,16.14 32.53,16.14 32.85,15.83 32.85,15.83 33.02,15.66 DU2.T22 ; U1.M3 18.92,17.31 19.23,17 19.66,17 v1(19.68,16.99)
  BOTTOM w0.102: v1(19.68,16.99) 19.57,17.1 19.32,17.1 19.26,17.16 19.26,17.86 19.37,17.98 19.37,18.19 20.41,19.23 21.64,19.23 21.66,19.22 21.88,18.99 22.5,18.99 22.6,19.09 23.62,19.09 23.62,19.09 24.67,19.09 25.3,19.09 25.66,18.73 25.84,18.55 28.44,15.95 31.53,15.95 v1(31.64,16.05)
SDQ7: length 20
  TOP w0.102: U1.L2 19.39,16.62 19.61,16.62 19.62,16.61 19.74,16.61 19.75,16.62 19.86,16.62 19.87,16.62 20.07,16.62 20.44,16.99 20.44,17.01 20.88,17.45 v1(20.92,17.45) ; DU2.T23 34.83,15.66 34.88,15.71 v1(34.89,15.71)
  BOTTOM w0.102: v1(34.89,15.71) 35.04,15.56 35.04,14.58 34.82,14.36 34.13,14.36 33.4,15.09 32.96,15.09 32.91,15.03 28.07,15.03 27.89,15.21 24.93,18.17 23.47,18.17 23.28,17.98 22.58,17.98 22.57,17.99 22.28,17.99 22.27,17.98 21.55,17.98 21.05,17.48 20.96,17.48 v1(20.92,17.45)
SDQ8: length 14.6
  TOP w0.102: DU2.A17 31.18,24.06 v1(31.28,24.16) ; v1(20.65,24.24) 20.72,24.17 20.72,23.28 20,22.56 U1.Y1
  BOTTOM w0.102: v1(20.65,24.24) 20.94,24.53 21.04,24.53 21.47,24.95 25.29,24.95 25.63,25.29 26.39,25.29 28.35,25.29 28.68,24.95 30.31,24.95 30.75,24.51 30.93,24.51 v1(31.28,24.16)
SDQ9: length 14.7
  TOP w0.102: v1(30.67,24.07) 30.68,24.06 DU2.A16
  TOP w0.113: U1.W2 19.68,22.19 v1(19.68,22.19)
  BOTTOM w0.102: v1(30.67,24.07) 30.64,24.07 30.06,24.65 28.56,24.65 28.22,24.99 25.76,24.99 25.42,24.65 21.64,24.65 20.83,23.83 20.55,23.83 20.5,23.89 20.18,23.89 19.92,23.63 19.92,22.42 v1(19.68,22.19)
SDQ10: length 15.2
  TOP w0.102: DU2.A14 29.68,24.02 29.81,24.15 29.81,24.17 v1(29.9,24.27) ; U1.W1 20.04,21.9 20.04,21.96 20.09,22.01 20.09,22.1 21.05,23.07 21.05,24.46 21.26,24.67 21.97,24.67 22.06,24.57 22.06,24.43 21.56,23.92 v1(21.5,23.92)
  BOTTOM w0.102: v1(29.9,24.27) 29.83,24.34 28.43,24.34 28.09,24.68 25.88,24.68 25.54,24.34 21.93,24.34 v1(21.5,23.92)
SDQ11: length 13.9
  TOP w0.102: v1(29.26,23.74) 29.24,23.72 29.24,23.22 DU2.A13
  TOP w0.113: U1.V3 19.03,21.54 v1(19.03,21.54)
  BOTTOM w0.102: v1(29.26,23.74) 29.24,23.74 28.95,24.04 28.31,24.04 27.97,24.38 26.01,24.38 25.67,24.04 25.09,24.04 24.91,23.87 24.68,23.87 24.51,24.04 24.27,24.04 24.1,23.87 23.87,23.87 23.7,24.04 23.46,24.04 23.29,23.87 23.05,23.87 22.88,24.04 22.2,24.04 21.54,23.38 21.39,23.38 21.23,23.54 21.08,23.54 20.94,23.4 20.94,23.02 20.84,22.92 20.7,22.92 20.65,22.97 20.51,22.97 20.36,22.82 20.36,22.68 20.46,22.58 20.46,22.46 20.03,22.03 20.03,22.01 19.73,21.71 19.2,21.71 v1(19.03,21.54)
SDQ12: length 14.3
  TOP w0.102: DU2.B12 28.68,21.62 28.58,21.52 27.67,21.52 27.21,21.98 v1(27.21,22.04)
  TOP w0.113: U1.U2 19.68,20.89 v1(19.68,20.89)
  BOTTOM w0.102: v1(27.21,22.04) 27.15,22.04 25.74,23.45 22.4,23.45 22.15,23.45 21.71,23.01 21.7,23.01 21.44,23.01 20.34,21.91 20.34,21.74 19.95,21.35 19.4,21.35 19,20.94 19,20.71 19.07,20.63 19.42,20.63 v1(19.68,20.89)
SDQ13: length 15.4
  TOP w0.102: DU2.B14 29.68,21.93 28.96,21.22 27.43,21.22 v1(26.69,21.96)
  TOP w0.113: v1(18.37,19.58) 18.37,19.58 U1.T3
  BOTTOM w0.102: v1(26.69,21.96) 26.69,22.05 25.59,23.15 22.27,23.15 21.83,22.7 21.57,22.7 20.64,21.78 20.64,21.52 20.12,21 20.12,20.81 19.59,20.28 19.03,20.28 18.37,19.63 v1(18.37,19.58)
SDQ14: length 14.3
  TOP w0.102: U1.T2 19.39,19.94 19.61,19.94 19.7,20.03 19.88,20.21 19.95,20.21 21,21.26 21,21.37 21.15,21.52 v1(21.17,21.52) ; DU2.B15 30.18,22 29.09,20.91 28.68,20.91 27.19,20.91 v1(26.13,21.97)
  BOTTOM w0.102: v1(26.13,21.97) 26.13,22.1 25.42,22.82 22.38,22.82 21.96,22.4 21.73,22.4 21.16,21.83 21.16,21.53 v1(21.17,21.52)
SDQ15: length 14.3
  TOP w0.102: v1(21.93,21.95) 21.76,21.78 21.76,21.59 20.08,19.91 U1.T1 ; v1(25.5,22.01) 26.9,20.61 29.22,20.61 30.32,21.72 30.84,21.72 31.18,22.05 DU2.B17
  BOTTOM w0.102: v1(21.93,21.95) 21.93,21.99 22.03,22.09 22.08,22.09 22.42,22.43 22.63,22.43 22.66,22.46 25.05,22.46 v1(25.5,22.01)
SDQ16: length 29.5
  TOP w0.102: v1(35.5,12.51) 35.43,12.51 33.97,11.06 33.22,11.06 32.27,10.11 32.1,9.93 23.64,9.93 22.81,10.76 22.81,11.2 21.63,12.38 21.33,12.38 20.99,12.72 19.39,12.72 U1.E2 ; DU2.E23 34.57,21.16 34.63,21.21 v1(34.67,21.21)
  BOTTOM w0.102: v1(34.67,21.21) 35.18,21.21 36.09,20.3 36.09,18.76 36.51,18.34 36.51,13.31 35.71,12.51 v1(35.5,12.51)
SDQ17: length 30.9
  TOP w0.102: U1.D2 19.43,12.11 19.76,11.78 20.64,11.78 20.95,11.47 21.25,11.47 21.9,10.82 21.9,10.38 23.26,9.02 33.25,9.02 v1(33.26,9.03) ; DU2.G23 34.99,20.16 37.05,18.1 37.05,11.15 37.04,11.14 37.04,11.11 36.11,10.17 v1(35.83,10.17)
  BOTTOM w0.102: v1(35.83,10.17) 35.79,10.22 35.65,10.22 34.45,9.03 v1(33.26,9.03)
SDQ18: length 29
  TOP w0.102: U1.D1 20.74,12.11 21.08,11.77 21.38,11.77 22.21,10.95 22.21,10.51 23.39,9.32 32.35,9.32 32.7,9.67 v1(33.93,9.67) ; v1(36.27,10.83) 36.3,10.83 36.75,11.28 36.75,17.98 35.06,19.66 DU2.H23
  BOTTOM w0.102: v1(33.93,9.67) 34.05,9.67 35.24,10.86 36.24,10.86 v1(36.27,10.83)
SDQ19: length 31.5
  TOP w0.102: DU2.D23 34.42,21.66 34.59,21.83 v1(34.64,21.83) ; v1(34.05,10.54) 33.14,10.54 32.22,9.62 23.52,9.62 22.51,10.63 22.51,10.82 22.51,11.07 21.5,12.08 21.2,12.08 20.87,12.41 19.01,12.41 U1.D3
  BOTTOM w0.102: v1(34.64,21.83) 34.95,21.52 35.31,21.52 36.4,20.43 36.4,18.89 36.64,18.65 36.82,18.47 36.82,13.11 35.37,11.66 35.17,11.66 35.07,11.56 v1(34.05,10.54)
SDQ20: length 31
  TOP w0.102: DU2.F22 33.32,20.66 30.97,18.31 30.97,15.14 31.45,14.65 v1(31.53,14.65) ; v1(30.93,7.72) 30.86,7.65 30.86,7.51 30.36,7.01 21.84,7.01 19.35,9.5 U1.A2
  BOTTOM w0.102: v1(30.93,7.72) 30.93,7.79 33.3,10.16 33.3,10.64 33.3,10.91 33.84,11.44 33.84,13.11 33.84,13.36 33.79,13.41 33.79,13.43 33.41,13.82 33.38,13.82 33.14,14.06 32.87,14.06 32.82,14.11 32.28,14.11 31.73,14.65 v1(31.53,14.65)
SDQ21: length 31.3
  TOP w0.102: v1(30.88,14.67) 30.85,14.71 30.85,14.71 30.66,14.9 30.66,18.43 33.26,21.03 33.41,21.03 33.42,21.04 33.53,21.04 33.65,21.16 DU2.E22 ; U1.B2 19.7,10.46 19.7,9.58 21.96,7.32 30.12,7.32 v1(30.33,7.53)
  BOTTOM w0.102: v1(30.89,14.67) 30.89,14.67 31.52,14.04 31.75,14.04 31.99,13.8 32.69,13.8 32.74,13.75 33.02,13.75 33.25,13.51 33.28,13.51 33.49,13.3 33.49,13.28 33.53,13.23 33.53,11.57 33,11.03 33,10.29 30.33,7.62 v1(30.33,7.53)
SDQ22: length 30.3
  TOP w0.102: v1(30.34,14.64) 30.34,18.61 32.66,20.93 32.66,21.4 33.06,21.8 33.21,21.8 33.58,22.16 DU2.C22 ; v1(29.82,7.72) 29.76,7.67 22.7,7.67 20.52,9.85 20.52,9.85 20.51,9.86 20.51,9.91 20.47,9.95 20.47,10.34 U1.B1
  BOTTOM w0.102: v1(30.34,14.64) 30.42,14.64 30.49,14.56 30.49,14.56 31.37,13.69 31.67,13.69 31.91,13.45 32.22,13.45 32.27,13.5 32.57,13.5 32.78,13.29 32.78,12.99 32.71,12.93 32.71,12.92 32.69,12.91 32.69,11.16 32.69,10.6 v1(29.82,7.72)
SDQ23: length 31.3
  TOP w0.102: v1(31.53,7.76) 31.17,7.4 31.17,7.39 30.49,6.71 30.48,6.71 30.44,6.67 21.75,6.67 18.7,9.72 U1.A3 ; v1(32.49,14.51) 32.45,14.51 32.39,14.57 32.11,14.57 31.68,15.01 31.53,15.01 31.27,15.27 31.27,18.18 32.58,19.49 33.36,19.49 33.49,19.62 33.64,19.62 DU2.H22
  BOTTOM w0.102: v1(32.49,14.51) 32.6,14.41 32.95,14.41 32.99,14.36 33.27,14.36 33.27,14.36 33.53,14.12 34.1,13.56 34.1,13.53 34.14,13.49 34.14,12.98 34.14,11.31 33.96,11.13 33.61,10.78 33.61,10.51 33.61,9.96 31.53,7.88 v1(31.53,7.76)
SDQ24: length 18.9
  TOP w0.102: v1(30.93,13.1) 30.93,13.02 31.06,12.89 31.06,12.78 DU2.AB17
  TOP w0.113: v1(17.78,10.43) 17.78,10.43 18.05,10.16 U1.A4
  BOTTOM w0.102: v1(30.93,13.1) 30.9,13.1 30.74,12.93 30.74,12.67 30.59,12.52 30.21,12.52 29.83,12.14 27.52,12.14 27.41,12.04 27.41,10.44 26.51,9.54 26.36,9.54 26.03,9.87 25.89,9.87 25.74,9.72 25.74,9.58 26.06,9.26 26.06,9.11 25.96,9.01 19.68,9.01 19.45,9.23 19.45,9.88 18.89,10.43 v1(17.78,10.43)
SDQ25: length 19.4
  TOP w0.102: DU2.AB14 29.63,12.71 29.63,13.63 v1(29.37,13.89)
  TOP w0.113: U1.B4 18.33,11.08 18.33,11.09 v1(18.39,11.15)
  BOTTOM w0.102: v1(29.37,13.89) 29.65,13.61 29.79,13.61 30.05,13.87 30.05,14.16 29.75,14.46 29.33,14.46 28.79,13.93 28.55,13.93 28.36,14.12 27.53,14.12 27.23,13.82 27.23,13.45 26.98,13.19 26.82,13.19 26.62,12.99 26.62,12.38 26.8,12.2 26.8,10.89 26.47,10.55 25.44,10.55 24.58,9.69 20.67,9.69 20.28,10.08 20.14,10.08 18.91,11.31 18.56,11.31 18.4,11.15 v1(18.39,11.15)
SDQ26: length 18.9
  TOP w0.102: DU2.AB12 28.82,12.8 28.82,14.29 v1(28.66,14.45)
  TOP w0.113: v1(18.33,11.73) 18.33,11.73 18.05,11.46 U1.C4
  BOTTOM w0.102: v1(18.33,11.73) 18.27,11.79 17.98,11.79 17.9,11.87 17.9,12.17 18.05,12.32 18.37,12.32 20.31,10.39 20.4,10.39 20.8,9.99 24.45,9.99 25.32,10.86 26.34,10.86 26.5,11.02 26.5,11.98 26.29,12.18 26.29,13.92 26.68,14.31 27.24,14.31 27.61,14.68 27.93,14.68 28.16,14.45 v1(28.66,14.45)
SDQ27: length 18.7
  TOP w0.102: DU2.AB15 30.18,12.69 30.12,12.75 30.12,12.76 30.11,12.76 30.11,13.03 v1(29.98,13.16)
  TOP w0.113: v1(17.68,11.08) 17.68,11.08 17.4,10.81 U1.B5
  BOTTOM w0.102: v1(17.68,11.08) 18.02,10.74 19.02,10.74 19.75,10 19.75,9.43 19.85,9.33 24.84,9.33 25.73,10.23 26.6,10.23 27.11,10.73 27.11,12.32 26.99,12.44 26.99,12.74 27.53,13.28 27.53,13.57 27.61,13.64 27.78,13.64 27.83,13.58 27.83,12.87 27.99,12.72 28.71,12.72 28.85,12.85 29.27,12.85 29.61,13.2 29.94,13.2 v1(29.98,13.16)
SDQ28: length 18.3
  TOP w0.102: v1(28.54,11.46) 28.56,11.48 28.56,11.61 28.79,11.84 28.81,11.84 29.13,12.16 DU2.AC13 ; v1(17.85,9.66) 17.85,9.84 17.05,10.64 17.05,11.18 16.78,11.46 U1.C6
  BOTTOM w0.102: v1(17.85,9.66) 17.85,9.12 17.93,9.04 18.4,9.04 18.48,9.12 18.48,9.88 18.58,9.98 18.91,9.98 19.04,9.85 19.04,9.11 19.5,8.65 26.13,8.65 27.8,10.33 27.8,10.66 27.93,10.79 28.08,10.79 28.21,10.65 28.49,10.65 28.56,10.72 28.56,11.44 v1(28.54,11.46)
SDQ29: length 19.1
  TOP w0.102: U1.A7 16.1,9.18 16.11,9.16 17.24,8.04 17.24,8.04 17.41,7.87 v1(17.89,7.87) ; DU2.AC16 30.36,11.84 30.29,11.84 29.91,11.46 v1(29.91,11.45)
  BOTTOM w0.102: v1(29.91,11.45) 29.91,11.21 29.71,11.02 29.71,10.98 29.5,10.77 29.47,10.77 26.74,8.04 19.25,8.04 18.88,8.41 18.73,8.41 18.69,8.37 18.69,8.15 18.59,8.05 18.39,8.05 18.3,8.14 18.3,8.34 18.22,8.41 18.01,8.41 17.89,8.29 v1(17.89,7.87)
SDQ30: length 20.1
  TOP w0.102: v1(18.32,7.4) 17.44,7.4 17.11,7.73 17.11,7.73 15.81,9.04 15.81,9.04 15.45,9.4 U1.B8 ; DU2.AC17 30.58,11.56 30.52,11.56 v1(30.46,11.5)
  BOTTOM w0.102: v1(30.46,11.5) 30.43,11.47 30.43,11.26 26.91,7.74 18.73,7.74 18.4,7.4 v1(18.32,7.4)
SDQ31: length 18.3
  TOP w0.102: v1(17.47,8.34) 17.37,8.34 16.42,9.29 16.42,10.5 16.11,10.81 U1.B7 ; v1(29.12,11.62) 29.18,11.68 29.18,11.69 29.64,12.15 29.67,12.15 DU2.AC14
  BOTTOM w0.102: v1(17.47,8.34) 17.47,8.49 17.71,8.73 18.99,8.73 19.37,8.35 26.61,8.35 26.86,8.59 26.86,8.93 27,9.08 27.34,9.08 27.43,9.17 27.43,9.51 27.58,9.65 27.92,9.65 28.04,9.77 28.04,10.09 28.2,10.26 28.53,10.26 28.87,10.61 28.87,11.34 29.12,11.59 v1(29.12,11.62)
SDQM0: length 19.3
  TOP w0.102: v1(34.62,17.37) 34.61,17.37 34.59,17.36 34.38,17.36 DU2.N23
  TOP w0.113: U1.R3 19.03,19.59 v1(19.03,19.59)
  BOTTOM w0.102: v1(34.62,17.37) 34.28,17.37 33.64,18.01 33.64,18.34 33.44,18.55 33.3,18.55 33.07,18.78 33.04,18.78 32.67,19.15 31.95,19.15 29.73,21.37 29.55,21.55 21.76,21.55 21.02,20.82 20.85,20.82 20.54,20.5 20.31,20.5 19.75,19.94 19.38,19.94 v1(19.03,19.59)
SDQM1: length 18.6
  TOP w0.102: DU2.B20 32.68,22.27 v1(32.52,22.11) ; U1.Y2 19.66,22.82 19.66,23.81 20.11,24.25 v1(20.11,24.32)
  BOTTOM w0.102: v1(32.52,22.11) 32.56,22.15 32.56,23.88 31.17,25.27 29.12,25.27 28.39,26 26.21,26 25.81,25.6 25.51,25.6 25.18,25.27 21.36,25.27 20.92,24.83 20.62,24.83 v1(20.11,24.32)
SDQM2: length 27.7
  TOP w0.102: U1.F3 19.05,13.06 20.29,13.06 20.33,13.02 21.12,13.02 21.17,12.97 21.46,12.69 21.76,12.69 23.12,11.33 23.12,10.88 23.77,10.23 31.97,10.23 32.92,11.18 33.1,11.36 33.85,11.36 34.76,12.27 34.76,12.36 v1(34.76,12.37) ; DU2.L23 34.27,18.25 35.04,18.25 35.43,18.64 v1(35.43,18.69)
  BOTTOM w0.102: v1(35.43,18.69) 35.74,18.69 36.21,18.22 36.21,13.44 35.71,12.94 35.32,12.94 34.76,12.38 34.76,12.37 v1(34.76,12.37)
SDQM3: length 21.7
  TOP w0.102: v1(20.55,6.41) 20.44,6.52 20.44,7.53 18.4,9.57 18.4,10.5 U1.B3 ; v1(32.42,13.14) 32.68,12.88 DU2.AB20
  BOTTOM w0.102: v1(20.55,6.41) 27.2,6.41 31.65,10.85 31.65,10.98 31.94,11.27 32.12,11.27 32.38,11.54 32.38,13.1 v1(32.42,13.14)
SDQS0: length 21.1
  TOP w0.097: U1.N1 20,18.04 20.16,18.19 20.53,18.19 21.07,18.73 21.33,18.73 21.91,19.31 22.32,19.31 v1(22.36,19.35) ; DU2.R23 34.63,16.16 34.65,16.18 34.65,16.18 34.66,16.19 v1(34.67,16.19)
  BOTTOM w0.097: v1(34.67,16.19) 34.63,16.19 34.55,16.27 34.03,16.27 33.77,16.02 33.58,15.83 33.58,15.83 32.77,15.83 32.14,16.46 30.34,16.46 30.06,16.75 30.06,17 29.96,17.1 29.77,17.1 29.67,17 29.67,16.75 29.39,16.46 28.78,16.46 27.72,17.52 27.72,17.92 28.08,18.28 28.08,18.42 27.94,18.55 27.81,18.55 27.45,18.19 27.05,18.19 26.73,18.52 26.73,18.92 27.09,19.27 27.09,19.41 26.95,19.55 26.81,19.55 26.46,19.19 26.06,19.19 25.71,19.53 22.5,19.53 22.36,19.39 v1(22.36,19.35)
SDQS0B: length 21.3
  TOP w0.097: DU2.P22 33.22,16.66 33.2,16.64 v1(33.18,16.64) ; U1.N2 19.47,17.96 20.03,18.51 20.4,18.51 20.94,19.05 21.2,19.05 v1(21.85,19.69)
  BOTTOM w0.097: v1(21.85,19.69) 22.01,19.85 25.84,19.85 26.19,19.51 26.32,19.51 26.68,19.86 27.08,19.86 27.4,19.54 27.4,19.14 27.05,18.78 27.05,18.65 27.18,18.51 27.32,18.51 27.68,18.87 28.08,18.87 28.4,18.55 28.4,18.15 28.04,17.79 28.04,17.65 28.91,16.78 29.26,16.78 29.35,16.88 29.35,17.13 29.64,17.41 30.09,17.41 30.37,17.13 30.37,16.88 30.47,16.78 32.27,16.78 32.91,16.15 33.45,16.15 33.63,16.32 33.63,16.54 33.53,16.63 33.19,16.63 v1(33.18,16.64)
SDQS1: length 16.1
  TOP w0.097: U1.V1 20.02,21.22 20.36,21.22 21.74,22.6 21.74,22.77 23.15,24.18 24.5,24.18 24.64,24.04 24.88,24.04 25.02,24.18 25.73,24.18 25.88,24.03 26.1,24.03 26.25,24.18 26.73,24.18 26.83,24.08 v1(26.83,23.9) ; v1(31.62,22.16) 31.68,22.22 DU2.B18
  BOTTOM w0.097: v1(26.83,23.9) 27.02,23.71 27.02,23.15 27.34,22.83 31.94,22.83 32.04,22.74 32.04,22.27 31.93,22.16 v1(31.62,22.16)
SDQS1B: length 16.1
  TOP w0.097: U1.V2 19.69,21.54 20.23,21.54 21.42,22.74 21.42,22.91 23.02,24.5 26.97,24.5 27.36,24.11 v1(27.36,23.9) ; DU2.A19 v1(32.18,23.65)
  BOTTOM w0.097: v1(27.36,23.9) 27.36,23.84 27.34,23.82 27.34,23.29 27.47,23.15 31.67,23.15 v1(32.18,23.65)
SDQS2: length 29.2
  TOP w0.097: DU2.J22 33.32,19.16 33.32,19.16 33.2,19.16 v1(33.18,19.14) ; v1(35.27,17.76) 35.49,17.54 35.49,17.45 36.02,16.93 36.02,11.84 34.84,10.67 34.84,9.67 33.7,8.53 22.93,8.53 21.26,10.2 21.26,10.36 21.26,10.62 21.07,10.8 21.07,10.8 20.54,11.34 20.44,11.43 20.03,11.43 U1.C1
  BOTTOM w0.097: v1(33.18,19.14) 33.18,19.14 33.2,19.16 33.32,19.16 33.33,19.16 33.98,19.16 34.16,18.98 34.16,18.29 34.53,17.92 35.11,17.92 v1(35.27,17.76)
SDQS2B: length 29.4
  TOP w0.097: U1.C2 19.7,11.11 20.32,11.11 20.32,11.11 20.94,10.49 20.94,10.07 22.14,8.87 22.8,8.21 33.84,8.21 35.16,9.53 35.16,10.53 36.33,11.71 36.33,17.06 35.81,17.59 v1(35.81,17.84) ; DU2.K23 v1(34.71,18.66)
  BOTTOM w0.097: v1(35.81,17.84) 35.41,18.24 34.66,18.24 34.56,18.34 34.56,18.56 34.66,18.66 v1(34.71,18.66)
SDQS3: length 20.6
  TOP w0.097: U1.B6 16.84,10.72 16.84,10.57 17.33,10.08 17.33,9.56 19.56,7.33 19.56,7.28 v1(19.58,7.27) ; v1(31.46,13.13) 31.46,12.88 DU2.AB18
  BOTTOM w0.097: v1(31.46,13.13) 31.46,12.62 31.28,12.44 31.11,12.44 30.81,12.15 30.81,11.04 26.98,7.2 19.64,7.2 v1(19.58,7.27)
SDQS3B: length 20.7
  TOP w0.097: v1(19.64,6.74) 19.49,6.74 19.07,7.16 19.07,7.38 17.01,9.43 17.01,9.94 16.8,10.16 U1.A6 ; DU2.AC19 32.18,11.84 v1(32.03,11.69)
  BOTTOM w0.097: v1(32.03,11.69) 31.59,12.12 31.24,12.12 31.13,12.02 31.13,10.91 27.11,6.88 19.99,6.88 19.84,6.74 v1(19.64,6.74)
SVREF: length 30.3
  TOP w0.102: DC17.2 35.42,22.89 ; DC18.2 35.42,21.9 35.42,21.91 ; U1.K1 20.42,16.01 20.89,16.48 21.22,16.48 21.65,16.92 21.76,16.92 21.77,16.91 DC7.2
  TOP w0.254: v1(35.61,20.18) 35.42,20.37 DC19.2 35.42,23.92 DR2.2 35.52,23.93 DR1.1 36.54,24.96 DC16.1 ; v1(31.68,18) 31.72,17.96 32.6,17.96 32.9,17.66 DU2.M22 ; v1(31.12,20.87) 31.04,20.87 v1(29.73,19.56) 27.98,19.56 25.57,17.15 24.66,17.15 v1(24.27,16.77) 24.16,16.66 DU2.P2 ; v1(22.38,16.92) 21.76,16.92
  BOTTOM w0.254: v1(31.12,20.87) 31.86,20.14 32.49,20.14 33.02,19.6 35.04,19.6 35.61,20.17 v1(35.61,20.18) ; v1(22.38,16.92) 22.42,16.87 23.6,16.87 23.7,16.77 v1(24.27,16.77) ; v1(31.68,18) 31.31,18 29.75,19.56 v1(29.73,19.56)
N21024816: length 17.8
  TOP w0.102: U1.T5 17.4,20.03 17.81,20.44 17.96,20.44 18.33,20.81 18.33,20.84 v1(18.36,20.86)
  TOP w0.254: DR5.1 v1(29.67,26.28)
  BOTTOM w0.102: v1(18.36,20.86) 18.37,20.86 18.38,20.87 18.38,21.57 18.96,22.15 18.96,22.44 19,22.44 19.56,23.01 19.56,24.77 20.59,25.79 22.85,25.79 23.11,26.05 24.05,26.05 24.07,26.03 25.31,26.03 26.17,26.89 29.07,26.89 v1(29.67,26.28)
N21100572: length 13.8
  TOP w0.102: DR8.2 27.78,25.14 27.78,23.79 27.53,23.55 23.12,23.55 22.37,22.8 22.37,21.28 22.7,20.96 22.7,20.23 22.86,20.07 22.86,16.98 DU2.P1

## Copper pours and planes (outline as drawn; the poured copper is in the pictures)
GND on GND1: 5.1,29.35 5.1,3.62 41.03,3.62 41.03,29.35
VCC-DRAM on POWER1: 19.53,5.4 17.2,7.73 17.2,11.31 17.64,11.75 17.64,12.22 17.39,12.47 16.57,12.47 16.14,12.9 16.14,18.21 17.35,19.42 17.35,19.98 18.34,20.96 18.34,21.75 18.78,22.19 18.78,22.9 19.48,23.6 19.48,25.2 21.37,27.1 21.64,27.1 24.08,29.54 35.11,29.54 35.93,28.72 35.93,26.68 37.66,24.95 37.66,10.42 32.65,5.4
Net_17 on POWER1: -12.95,75.49 -12.91,57.3 -21.83,57.3 -22.04,57.43 -22.25,57.3 -29.22,57.3 -29.22,77.81 -14.9,77.75

## Text on the board
DISPLAY_TOP: FIGURE | SIZE | 8.0 | 27.559 | 27.56 | 29.528 | 35.433 | 40.0 | 59.055 | 118.11 | 125.984 | 43.307 | 59.1 | 62.988 | 78.74 | 33.465x25.591 | 59.055x32.677 | 66.929x35.433 | 106.299x35.429 | 120.0x50.0 | DRILL CHART: TOP to BOTTOM | ALL UNITS ARE IN MILS | PLATED | NON-PLATED | QTY | 2445 | 5 | 86 | 2 | 4 | 84 | 29 | 1 | 3
